# Altium PCB PCB2.PcbDoc
Units mil, origin at the board's own origin, x right, y up, seen from the top; angles counter-clockwise.
Board outline 3070 x 1975 mil, 2 copper layers (Top Layer, Bottom Layer); 11 components, 25 nets, 95 pads, 0 vias.
Unrouted connection lines stored in the file: 2.
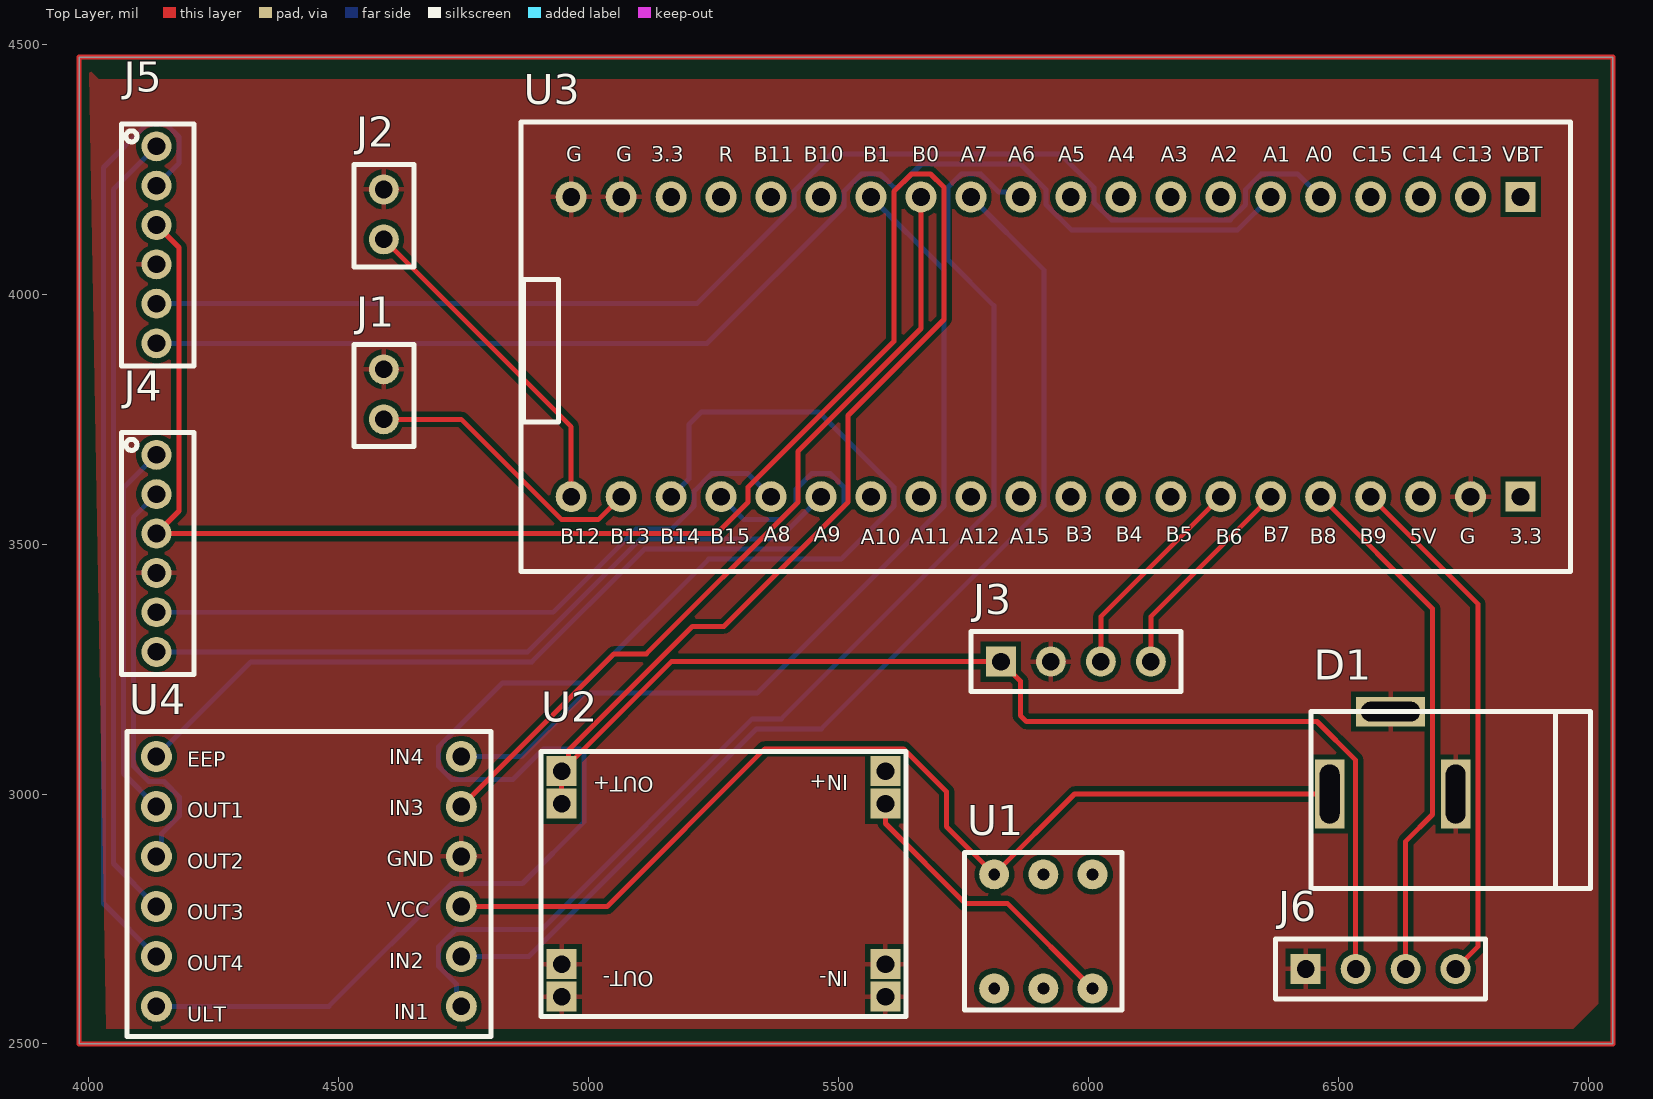
[diagram p0: Top Layer view]
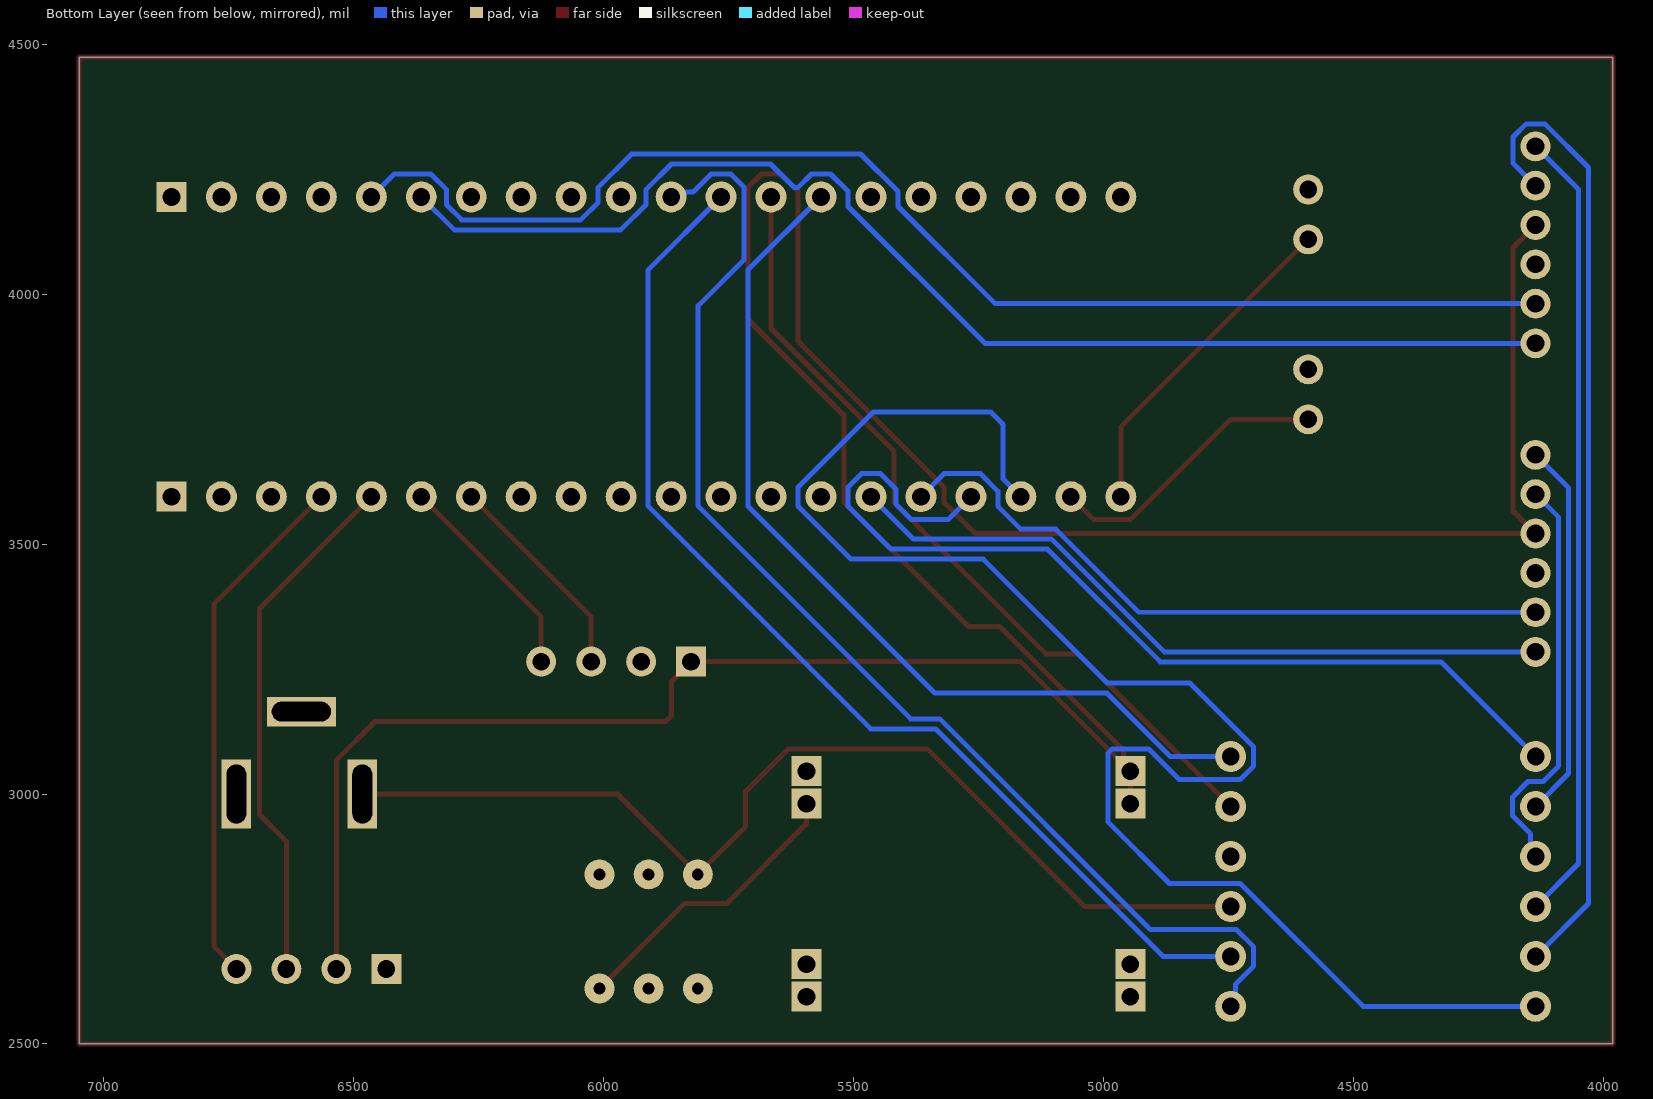
[diagram p1: Bottom Layer view, seen from below]

## Layer stack, top to bottom
Top Solder: solder mask 0.4, Solder Resist, Dk 3.5
Top Layer: signal copper 1.4
Dielectric 1: dielectric 12.6, FR-4, Dk 4.8
Bottom Layer: signal copper 1.4
Bottom Solder: solder mask 0.4, Solder Resist, Dk 3.5

## Board outline
3980,2500 3980,4475 7050,4475 7050,2500

## Design rules (kind name [scope] priority, off if disabled: settings)
Clearance [All] p1: gap=10 ignorepadtopadclearanceinfootprint=FALSE except(0: Arc-Hole Track-Hole SMDPad-Hole THPad-Hole Via-Hole Fill-Hole Poly-Hole Region-Hole Text-Hole)
PolygonConnect [All] p1: connectstyle=Relief reliefconductorwidth=10 reliefentries=4 polygonreliefangle="90 Angle" airgapwidth=10
RoutingVias [All] p1: holewidth=28 width=50 viastyle="Through Hole" minholewidth=28 minwidth=50 maxholewidth=28 maxwidth=50
SolderMaskExpansion [All] p1: expansion=4 istentingtop=FALSE
Width [All] p1: maxlimit=10 minlimit=10 preferedwidth=10
30 further rules are at their usual default settings.

## Components (designator, comment, footprint, x,y, rotation, side; value= is the part's Value field where it differs from the comment)
D1 "DC-005" DC-005 6605,2985 r0 top
J1 "P2" P2 4590,3800 r0 top
J2 "P2" P2 4590,4160 r0 top
J3 "P4" P4 5975,3265 r90 top
J4 "PH2.0-6P" PH2.0-6P 4155,3628.74 r0 top
J5 "PH2.0-6P" PH2.0-6P 4155,4246.22 r0 top
J6 "P4" P4 6585,2650 r90 top
U1 "自锁开关" 自锁开关 5910,2725 r0 top
U2 "MP1584EN" MP1584EN 5270,2820 r180 top
U3 "stm32f103c8t6" stm32f103c8t6 5915,3895 r270 top
U4 "DRV8833" DRV8833 4440,2825 r0 top

## Footprints (in the part's own frame and the unit in brackets; to place one, negate y for a bottom-side part, rotate by r counter-clockwise, add the part's x,y. Pads: shape width x height; smd on the part's side, far side on the other; paste and mask are expansions set on the pad)
DC-005 [mm]
  rect 1.5x3.5 hole 1 slot 3 at 90 deg: 1(-3.098,0.381) 2(3.302,0.381)
  rect 3.5x1.5 hole 1 slot 3 at 0 deg: 3(0,4.572)
  silkscreen extent -4.04,-4.43 10.16,4.57, body extent -3.12,-4.5 10.93,4.8, height 11.2
DRV8833 [mil]
  round 62 hole 35.43: 1(-305.12,250) 2(-305.12,150) 3(-305.12,50) 4(-305.12,-50) 5(-305.12,-150) 6(-305.12,-250) 7(305.12,250) 8(305.12,150) 9(305.12,50) 10(305.12,-50) 11(305.12,-150) 12(305.12,-250)
  silkscreen extent -364,-310 364,300, body extent -355,-300 355,300, height 335
MP1584EN [mm]
  rect 1.524x1.524 hole 0.9: 1(-8.23,4.079) 1(-8.23,5.73) 2(-8.23,-5.73) 2(-8.23,-4.079) 3(8.23,4.079) 3(8.23,5.73) 4(8.23,-5.73) 4(8.23,-4.079)
  silkscreen extent -9.27,-6.73 9.27,6.73, body extent -9.53,-7.49 9.53,7.49, height 8.5
P2 [mil]
  round 60 hole 35.43: 1(0,50) 2(0,-50)
  silkscreen extent -60,-105 60,100, body extent -50,-100 50,100, height 335
P4 [mil]
  round 60 hole 35.43: 1(0,-150) 2(0,-50) 3(0,50)
  rect 60x60 hole 35.43: 4(0,150)
  silkscreen extent -60,-210 60,210, body extent -50,-200 50,200, height 335
PH2.0-6P [mil]
  round 60 hole 35.43: 1(-20,50) 1(-20,50) 2(-20,-28.74) 3(-20,-107.48) 4(-20,-186.22) 5(-20,-264.96) 6(-19.96,-344.29)
  silkscreen extent -90,-390 55,95, body extent -90,-419 95,129, height 237
stm32f103c8t6 [mil]
  rect 60x60 hole 35.43: 1(-300,950) 21(300,950)
  round 62 hole 35.43: 2(-300,850) 3(-300,750) 4(-300,650) 5(-300,550) 6(-300,450) 7(-300,350) 8(-300,250) 9(-300,150) 10(-300,50) 11(-300,-50) 12(-300,-150) 13(-300,-250) 14(-300,-350) 15(-300,-450) 16(-300,-550) 17(-300,-650) 18(-300,-750) 19(-300,-850) 20(-300,-950) 22(300,850) 23(300,750) 24(300,650) 25(300,550) 26(300,450) 27(300,350) 28(300,250) 29(300,150) 30(300,50) 31(300,-50) 32(300,-150) 33(300,-250) 34(300,-350) 35(300,-450) 36(300,-550) 37(300,-650) 38(300,-750) 39(300,-850) 40(300,-950)
  silkscreen extent -450,-1050 450,1050, body extent -350,-995 350,1005, height 335
自锁开关 [mm]
  round 1.524 hole 0.6: 1(0,-2.9) 2(0,2.9) 3(-2.5,2.9) 4(-2.5,-2.9) 5(2.5,2.9) 6(2.5,-2.9)
  silkscreen extent -4,-4 4,4

## Nets (pads, with @x,y where several pads share a name; then routed paths per layer and width w, separated by ;. In a path a pad name is that pad's centre, name@x,y a point inside that pad or via, vN(x,y) a via of type N, cw(c..) or ccw(c..) an arc to the next point about the centre after c; other vN are vias at no path point)
BUT1: J1.2 U3.39 | length 577.3
  Top Layer w10: J1.2 4744.95,3750 4945.95,3549 5019,3549 U3.39
BUT2: J2.2 U3.40 | length 670.3
  Top Layer w10: J2.2 4965,3735 U3.40
EEP: U3.37 U4.1 | length 1953.7
  Bottom Layer w10: U4.1 4324.33,3264.45 4886.17,3264.45 5111.72,3490 5425.05,3490 5511,3575.95 5511,3614.05 5484.05,3641 5461.67,3641 5445.95,3641 5415,3610.05 5415,3579.95 5384.05,3549 5311,3549 U3.37
GND: D1.2 D1.3 J1.1 J2.1 J3.3 J4.4 J5.4 J6.4 U2.1 U2.3 U3.19 U3.20 U3.22 U4.9
M1A: J4.5 U3.36 | length 1381.5
  Bottom Layer w10: J4.5 4928.93,3363.78 5095.15,3530 5165.05,3530 5211,3575.95 5211,3606.05 5245.95,3641 5319,3641 U3.36
M1B: J4.6 U3.35 | length 1458.6
  Bottom Layer w10: J4.6 4877.88,3284.45 5103.43,3510 5380,3510 U3.35
M1IN1: U3.11 U4.12 | length 2467.7
  Bottom Layer w10: U4.12 4735.17,2584.95 4735.17,2619.9 4699.12,2655.95 4699.12,2694.05 4734.06,2729 4906.08,2729 5327.53,3150.45 5385.5,3150.45 5811,3575.95 5811,3977.28 5719,4069.28 5719,4214.05 5745.95,4241 5784.93,4241 5820.98,4204.95 5855.05,4204.95 U3.11
M1IN2: U3.12 U4.11 | length 2218.6
  Bottom Layer w10: U4.11 4880.36,2675 5335.81,3130.45 5465.5,3130.45 5911,3575.95 5911,4049 U3.12
M1OUT1: J4.1 U4.2 | length 758.5
  Bottom Layer w10: U4.2 4068.88,3041 4068.88,3612.62 J4.1@4135,3678.74
M1OUT2: J4.2 U4.3 | length 818.9
  Bottom Layer w10: U4.3 4144.83,2884.95 4144.83,2919.9 4180.88,2955.95 4180.88,2994.05 4149.94,3025 4119.83,3025 4088.88,3055.95 4088.88,3553.88 J4.2
M2A: J5.5 U3.5 | length 2618.9
  Bottom Layer w10: J5.5 5216.31,3981.26 5411,4175.95 5411,4206.05 5485.95,4281 5944.05,4281 6011,4214.05 6011,4183.95 6045.95,4149 6284.05,4149 6315,4179.95 6315,4210.05 6345.95,4241 6419,4241 U3.5
M2B: J5.6 U3.6 | length 2518.2
  Bottom Layer w10: J5.6 5236.99,3901.93 5511,4175.95 5511,4206.05 5545.95,4241 5584.05,4241 5610.86,4214.2 5619.14,4214.2 5665.95,4261 5864.05,4261 5915,4210.05 5915,4179.95 5965.95,4129 6299,4129 U3.6
M2IN1: U3.13 U4.8 | length 1639.1
  Top Layer w10: U4.8 5050.57,3280.45 5115.5,3280.45 5419,3583.95 5419,3685.77 5665,3931.77 U3.13
M2IN2: U3.14 U4.7 | length 1852.9
  Bottom Layer w10: U4.7 4865.9,3075 4992.92,3202.03 5337.08,3202.03 5711,3575.95 5711,4049 U3.14
M2OUT1: J5.1 U4.4 | length 1592.5
  Bottom Layer w10: U4.4 4048.88,2861 4048.88,4210.1 J5.1@4135,4296.22
M2OUT2: J5.2 U4.5 | length 1936.9
  Bottom Layer w10: U4.5 4028.88,2781 4028.88,4253.74 4116.36,4341.22 4153.64,4341.22 4180,4314.86 4180,4262.48 J5.2
NetU1_2: U1.2 U1.5
NetU1_6: U1.6 U2.2 | length 590.8
  Top Layer w10: U2.2@5594.02,2980.59 5594.02,2940.98 5754.31,2780.69 5838.56,2780.69 U1.6
SCL: J6.2 U3.25 | length 1060.1
  Top Layer w10: U3.25 6688.9,3371.1 6688.9,2959.08 6635,2905.19 J6.2
SDA: J6.1 U3.24 | length 1052.3
  Top Layer w10: U3.24 6779.53,3380.47 6779.53,2694.53 J6.1
UartRX: J3.2 U3.27 | length 429.4
  Top Layer w10: J3.2 6025,3355 U3.27
UartTX: J3.1 U3.26 | length 429.4
  Top Layer w10: J3.1 6125,3355 U3.26
ULT: U3.38 U4.6 | length 3309.3
  Bottom Layer w10: U4.6 4480.06,2575 4726.06,2821 4867.61,2821 4990.98,2944.38 4990.98,3081.8 4982.2,3090.59 4909.77,3090.59 4848.18,3029 4726.06,3029 4699.12,3055.95 4699.12,3094.05 4827.09,3222.03 4992.03,3222.03 5240,3470 5505.05,3470 5611,3575.95 5611,3614.05 5460.05,3765 5225.86,3765 5200.4,3739.55 5200.4,3630.4 U3.38
VCC5: J3.4 J4.3 J5.3 J6.3 U2.4 | length 6540.5
  Top Layer w10: J5.3 4180.04,4093.7 4180.04,3566.3 J4.3 5256.31,3521.26 5319,3583.95 5319,3614.05 5611,3906.05 5611,4206.05 5645.95,4241 5684.05,4241 5711,4214.05 5711,3949.49 5519,3757.49 5519,3583.95 5270.73,3335.68 5207.79,3335.68 4959.52,3087.41 4959.52,3059.13 U2.4@4945.98,3045.59 ; U2.4@4945.98,2980.59 U2.4@4945.98,3045.59 ; J6.3 6535,3067.67 6457.67,3145 5875.86,3145 5864.14,3156.72 5864.14,3225.86 J3.4 5165.39,3265 U2.4@4945.98,3045.59
VCC12: D1.1 U1.3 U4.10 | length 2080.4
  Top Layer w10: U4.10 5036.91,2775 5352.5,3090.59 5630.23,3090.59 5716.12,3004.7 5716.12,2934.63 U1.3 5972.4,3000 D1.1
pads on no net: U1.1 U1.4 U3.1 U3.2 U3.3 U3.4 U3.7 U3.8 U3.9 U3.10 U3.15 U3.16 U3.17 U3.18 U3.21 U3.23 U3.28 U3.29 U3.30 U3.31 U3.32 U3.33 U3.34
copper on no net: | length 10090
  Top Layer w10: 3980,2500 7050,2500 7050,4475 3980,4475 3980,2500

## Polygon pours and split planes (outlines as drawn)
GND on Top Layer "GND_L01_P000" (solid, pour order 0): 4000,4450 4020,4430 7020,4430 7020,2580 6970,2530 4035,2530

## Text inside footprints (layer, text, board x,y; h text height)
U2: Top Overlay "OUT+" at 5130,3035 h30 r180; Top Overlay "OUT-" at 5130,2645 h30 r180; Top Overlay "IN+" at 5520,3037.27 h30 r180; Top Overlay "IN-" at 5520,2645 h30 r180
U3: Top Overlay "B12" at 4943.09,3501.09 h30; Top Overlay "B13" at 5043.09,3501.09 h30; Top Overlay "B14" at 5143.09,3501.09 h30; Top Overlay "B15" at 5243.09,3501.09 h30; Top Overlay "A8" at 5350,3505 h30; Top Overlay "A9" at 5450,3505 h30; Top Overlay "A10" at 5545,3500 h30; Top Overlay "A11" at 5643.09,3501.09 h30; Top Overlay "A12" at 5743.09,3501.09 h30; Top Overlay "A15" at 5843.09,3501.09 h30; Top Overlay "B3" at 5955,3505 h30; Top Overlay "B4" at 6055,3505 h30; Top Overlay "B5" at 6155,3505 h30; Top Overlay "B6" at 6255,3500 h30; Top Overlay "B7" at 6350,3505 h30; Top Overlay "B8" at 6443.09,3501.1 h30; Top Overlay "B9" at 6543.09,3501.1 h30; Top Overlay "5V" at 6643.09,3501.1 h30; Top Overlay "G" at 6743.09,3501.1 h30; Top Overlay "3.3" at 6843.09,3501.1 h30; Top Overlay "G" at 4955,4264.99 h30; Top Overlay "G" at 5055,4264.99 h30; Top Overlay "3.3" at 5125,4264.99 h30; Top Overlay "R" at 5260,4264.99 h30; Top Overlay "B11" at 5330,4264.99 h30; Top Overlay "B10" at 5430,4264.99 h30; Top Overlay "B1" at 5550,4264.99 h30; Top Overlay "B0" at 5648.09,4264.99 h30; Top Overlay "A7" at 5745,4264.99 h30; Top Overlay "A6" at 5840,4264.99 h30; Top Overlay "A5" at 5940,4265 h30; Top Overlay "A4" at 6040,4265 h30; Top Overlay "A3" at 6145,4265 h30; Top Overlay "A2" at 6245,4265 h30; Top Overlay "A1" at 6350,4265 h30; Top Overlay "A0" at 6435,4265 h30; Top Overlay "C15" at 6528.08,4265 h30; Top Overlay "C14" at 6628.08,4265 h30; Top Overlay "C13" at 6728.08,4265 h30; Top Overlay "VBT" at 6828.08,4265 h30
U4: Top Overlay "IN1" at 4611.13,2549.21 h30; Top Overlay "IN2" at 4601.14,2651.34 h30; Top Overlay "VCC" at 4596.14,2753.47 h30; Top Overlay "GND" at 4596.14,2855.6 h30; Top Overlay "IN3" at 4601.14,2957.73 h30; Top Overlay "IN4" at 4601.14,3059.86 h30; Top Overlay "ULT" at 4196.15,2544.21 h30; Top Overlay "OUT4" at 4196.15,2646.34 h30; Top Overlay "OUT3" at 4196.15,2748.47 h30; Top Overlay "OUT2" at 4196.15,2850.6 h30; Top Overlay "OUT1" at 4196.15,2952.73 h30; Top Overlay "EEP" at 4196.15,3054.86 h30